# Altium PCB RS485-CAN.PcbDoc
Units mm, origin at the board's own origin, x right, y up, seen from the top; angles counter-clockwise.
Board outline 60.98 x 42.57 mm, 2 copper layers (Top Layer, Bottom Layer); 67 components, 43 nets, 219 pads, 110 vias.
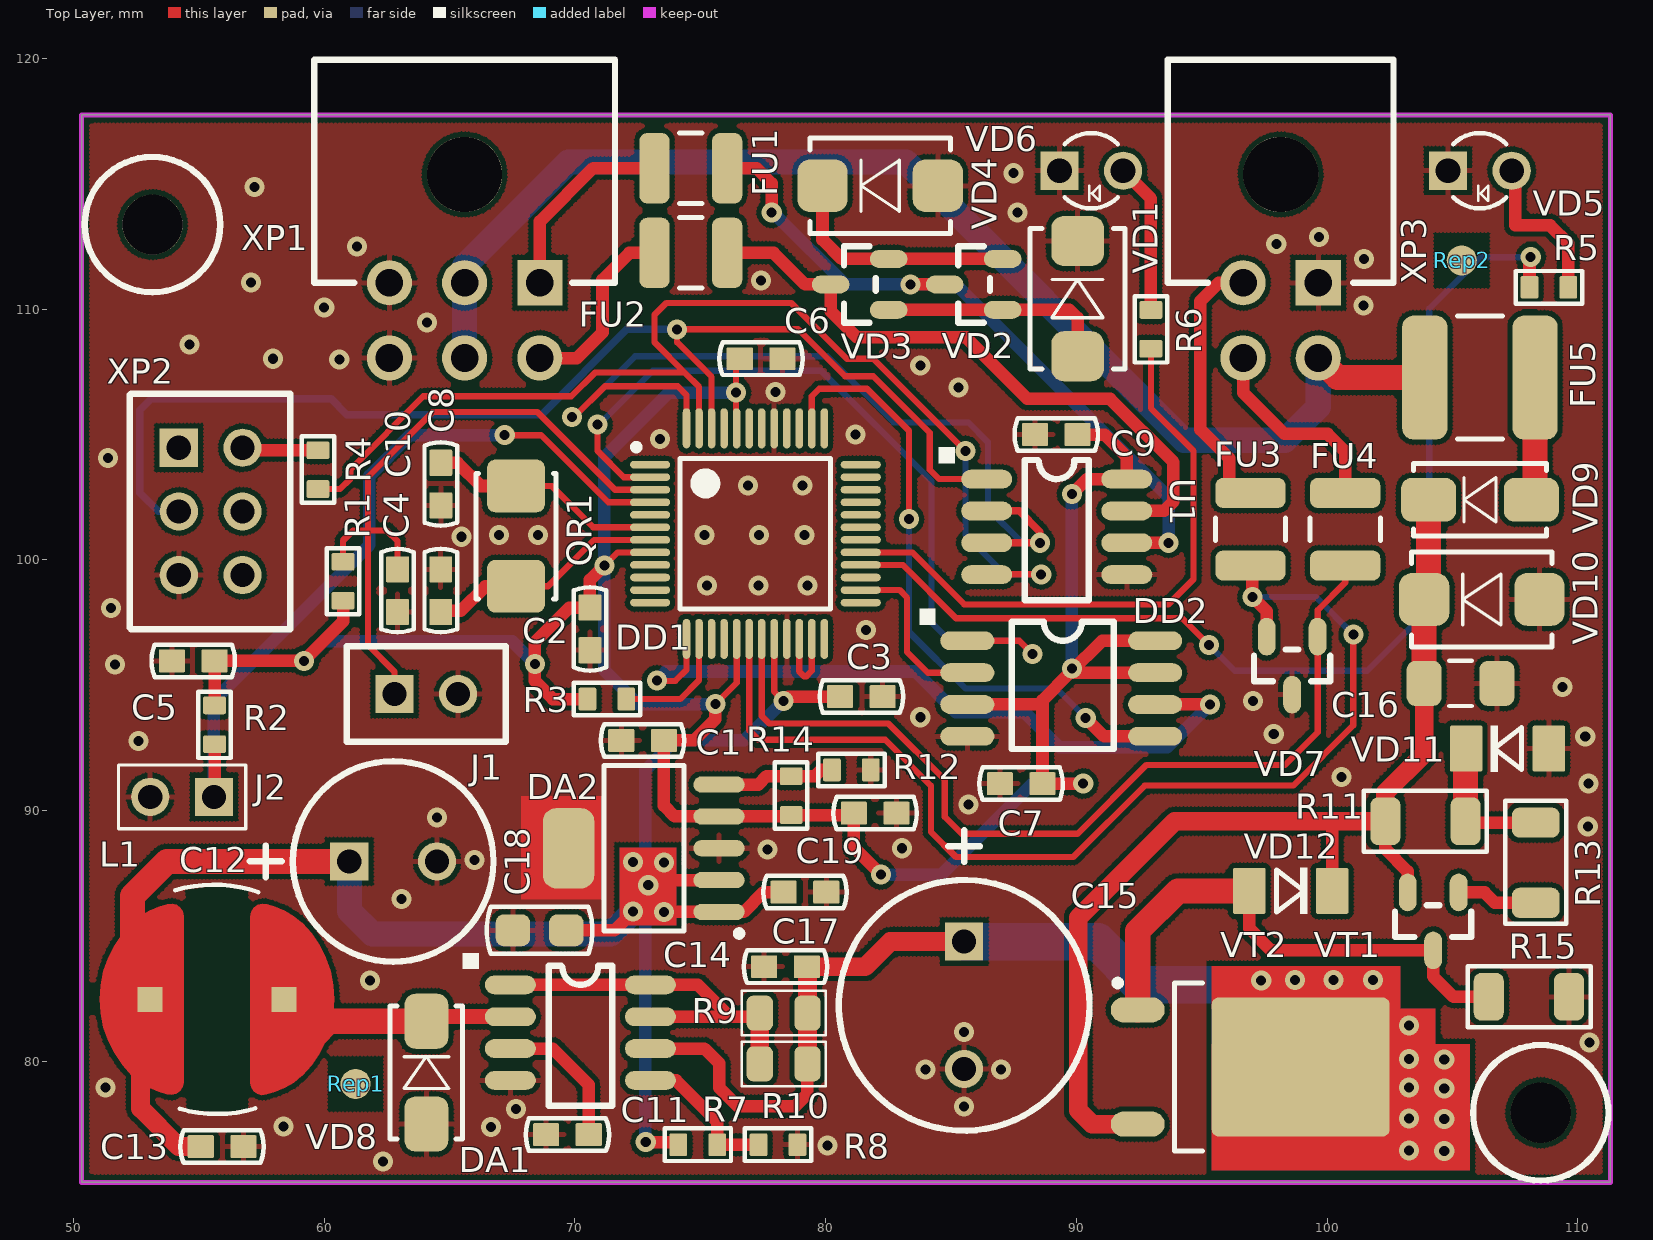
[diagram p0: Top Layer view]
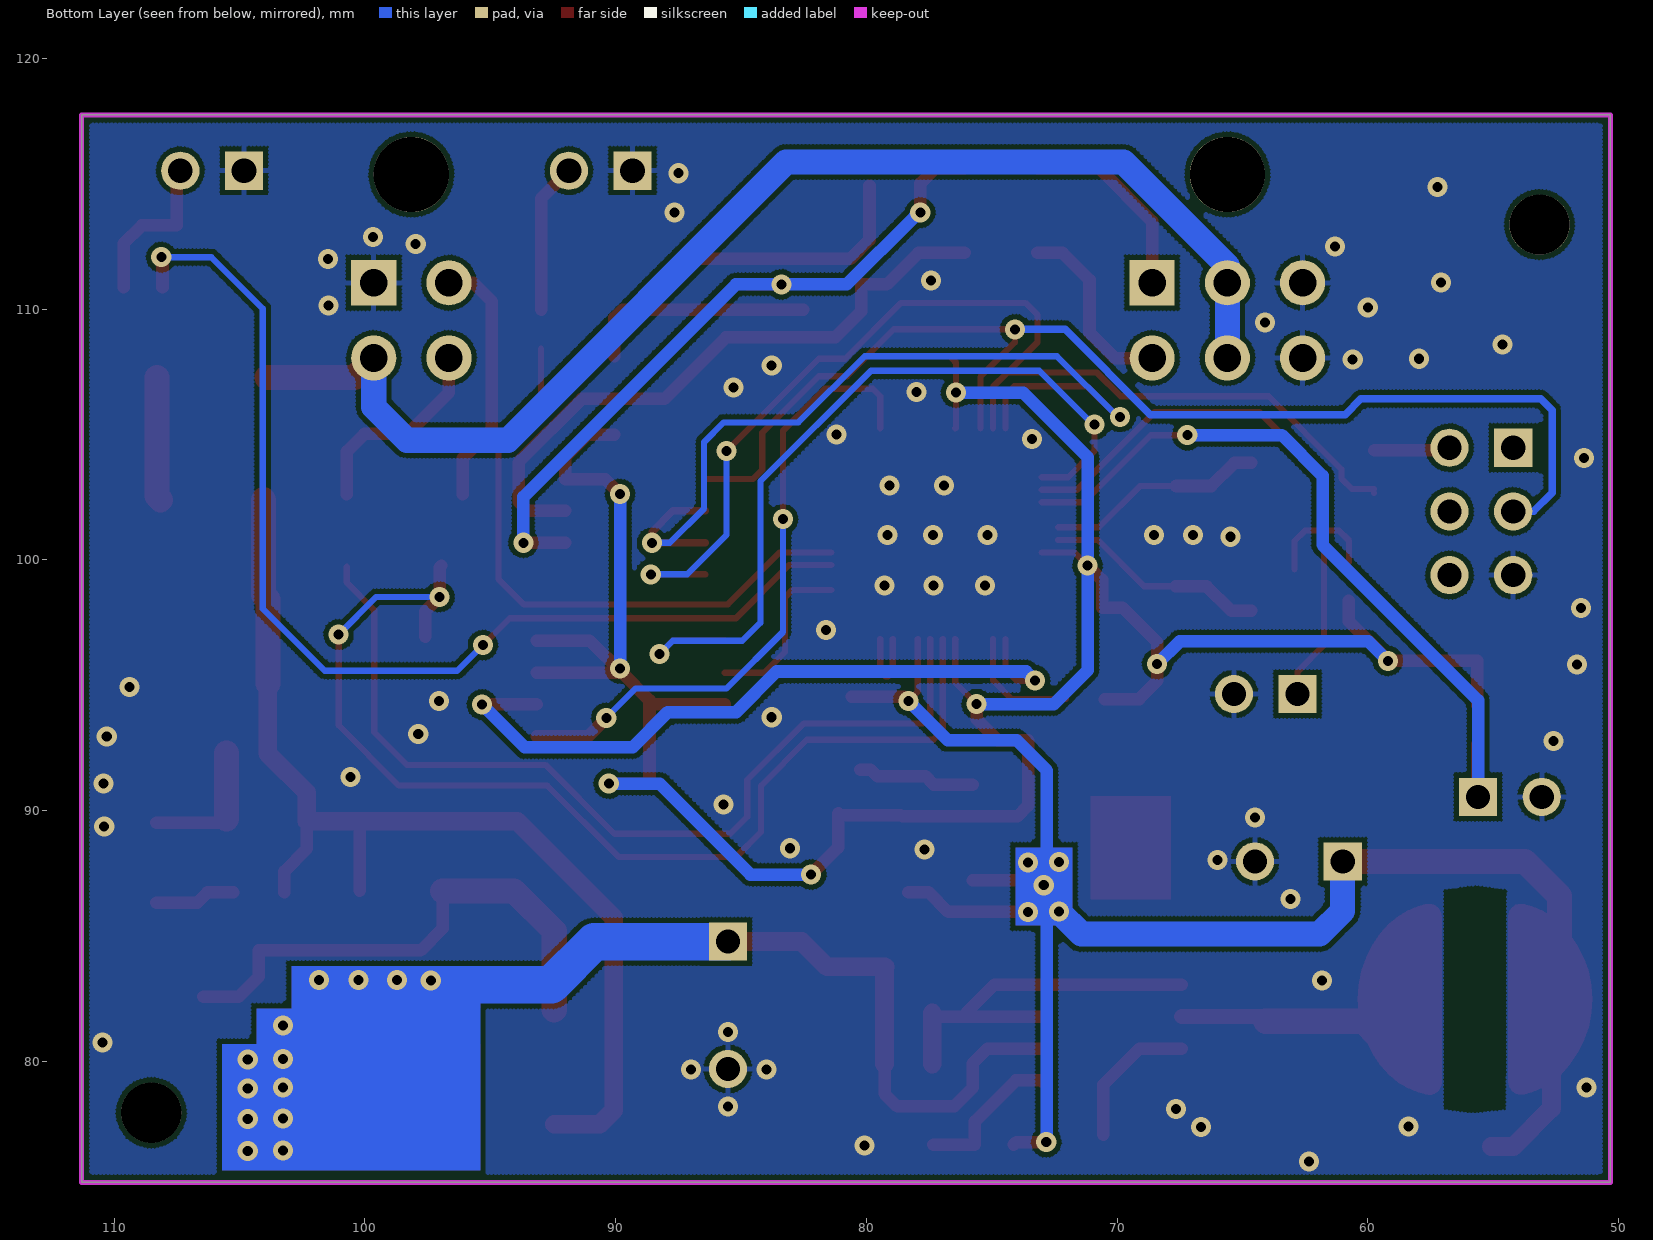
[diagram p1: Bottom Layer view, seen from below]

## Layer stack, top to bottom
Top Solder: solder mask 0.0102, Solder Resist, Dk 3.5
Top Layer: signal copper 0.0356
Dielectric 1: dielectric 0.32, FR-4, Dk 4.8
Bottom Layer: signal copper 0.0356
Bottom Solder: solder mask 0.0102, Solder Resist, Dk 3.5

## Board outline
50.325,75.175 50.325,117.75 111.3,117.75 111.3,75.175

## Design rules (kind name [scope] priority, off if disabled: settings)
Clearance [All] p1: gap=0.2
ComponentClearance [All] p1 off: gap=0.254 collisioncheckmode=3 verticalgap=0.254 showdistances=FALSE
Height [All] p1 off: minheight=0 maxheight=25.4 prefheight=12.7
HoleSize [All] p1: absolutevalues=TRUE maxlimit=5 minlimit=0.025 maxpercent=80.000 minpercent=20.000
MinimumSolderMaskSliver [All] p1: minsoldermaskwidth=0.05
PolygonConnect PolygonConnect_1 [IsVia] p1: connectstyle=Direct reliefconductorwidth=0.254 reliefentries=4 polygonreliefangle="90 Angle" airgapwidth=0.254
PolygonConnect [All] p2: connectstyle=Relief reliefconductorwidth=0.2 reliefentries=4 polygonreliefangle="90 Angle" airgapwidth=0.2
RoutingVias [All] p1: holewidth=0.4 width=0.8 viastyle="Through Hole" minholewidth=0.3 minwidth=0.6 maxholewidth=0.5 maxwidth=1
SilkToSilkClearance [All] p1: silktosilkclearance=0.1
SilkToSolderMaskClearance [IsPad] p1: minsilkscreentomaskgap=0.1 clearancetoexposedcopper=TRUE
SolderMaskExpansion SolderMaskExpansion_1 [InComponent('DD1')] p1: expansion=0.05
SolderMaskExpansion [All] p2: expansion=0.102
Width [All] p1: maxlimit=2 minlimit=0.2 preferedwidth=0.5
24 further rules are at their usual default settings.

## Classes and differential pairs
component class Main: C1 C2 C3 C4 C7 C8 C9 C10 C11 C12 DD1 DD2 FU1 FU2 FU3 FU4 J1 J2 QR1 R1 R2 R3 R4 R5 R6 Rep1 Rep2 U1 VD1 VD2 VD3 VD4 VD5 VD6 VD7 XP1 XP2
component class Power: C12 C13 C14 C15 C16 C17 C18 C19 DA1 DA2 FU5 L1 R7 R8 R9 R10 R11 R12 R13 R14 R15 VD8 VD9 VD10 VD11 VD12 VT1 VT2 XP2

## Components (designator, comment, footprint, x,y, rotation, side; value= is the part's Value field where it differs from the comment)
C1 "0.1uF" CC0603-3M 72.7,92.8 r180 top
C2 "0.1uF" CC0603-3M 70.6,97.25 r270 top
C3 "0.1uF" CC0603-3M 81.425,94.55 r0 top
C4 "200pF" CC0603-3M 62.925,98.775 r90 top
C5 "200pF" CC0603-3M 54.775,95.975 r0 top
C6 "0.1uF" CC0603-3M 77.425,108.025 r0 top
C7 "0.1uF" CC0603-3M 87.8,91.075 r0 top
C8 "22pF" CC0603-3M 64.65,103.025 r90 top
C9 "0.1uF" CC0603-3M 89.2,105 r180 top
C10 "22pF" CC0603-3M 64.648,98.775 r270 top
C11 "330pFx50V" CC0603-3M 69.7,77.075 r0 top
C12 "1000uFx10V" CC8X3.5 61,87.975 r0 top
C13 "1uFx16V" CC0603-3M 55.925,76.6 r180 top
C14 "0.1uFx50V" CC0603-3M 78.4,83.775 r180 top
C15 "470uF" CC16X10_CAP0.5(1)(Primary) 85.525,84.775 r270 top
C16 "0.1uFx250V" CC1206-MIDI 106.775,95.075 r180 top
C17 "0.1uFx50V" CC0603-3M 79.175,86.75 r0 top
C18 "4.7uFx16V" CC0805-MIDI-2M1 67.525,85.225 r0 top
C19 "1uFx10V" CC0603-3M 81.975,89.9 r180 top
DA1 "MC34063" SO-8 67.425,83.05 r270 top
DA2 "MCP1824T-ADJE/DC" SOT223-6 72.75,88.5 r180 top
DD1 "LPC11C24FBD48" LQFP48 77.2,101.05 r0 top
DD2 "M25P40" EIAJ_SO8 85.65,96.775 r0 top
FU1 "MICROSMD010F-2" RC1210 74.625,115.625 r180 top
FU2 "MICROSMD010F-2" RC1210 74.625,112.25 r180 top
FU3 "MICROSMD010F" RC1210 96.95,101.225 r90 top
FU4 "MICROSMD010F" RC1210 100.725,101.225 r90 top
FU5 "MF-SMDF050" MF-SMDF 106.1,107.275 r0 top
J1 "PLS-02" PIN2W 62.8,94.65 r0 top
J2 "PLS-02" PLS-02 55.6,90.55 r180 top
L1 "220uH" SDR0805 55.725,82.475 r0 top
QR1 "NX5032GA-12.000MHz LN-CD-1" AC5032_2 67.65,100.95 r270 top
R1 "10k" RC0603-3M 60.75,99.15 r90 top
R2 "10k" RC0603-3M 55.625,93.425 r90 top
R3 "10k" RC0603-3M 71.275,94.45 r180 top
R4 "100E" RC0603-3M 59.75,103.6 r90 top
R5 "330" RC0603-3M 108.85,110.875 r0 top
R6 "330" RC0603-3M 92.975,109.2 r90 top
R7 "3k 1%" RC0603-3M 74.9,76.675 r180 top
R8 "1k 1%" RC0603-3M 78.1,76.675 r180 top
R9 "1E" RC0805_IPC_NOM 78.325,81.925 r180 top
R10 "1E" RC0805_IPC_NOM 78.325,79.9 r180 top
R11 "220k" RC1206-2M 105.525,89.575 r180 top
R12 "15k 1%" RC0603-3M 81.025,91.625 r180 top
R13 "220k" RC1206-2M 108.325,86.325 r90 top
R14 "105k 1%" RC0603-3M 78.625,90.6 r90 top
R15 "220k" RC1206-2M 106.45,82.575 r0 top
Rep1 "REPER1.2" REPER1.2 61.25,79.1 r90 top
Rep2 "REPER1.2" REPER1.2 105.375,111.95 r90 top
U1 "ST3485EBDR" SO-8 86.425,103.225 r270 top
VD1 "SMBJ5.0A" SMB 90.05,110.425 r270 top
VD2 "BAV99" SOT-23(GSD) 87.075,109.975 r90 top
VD3 "BAV99" SOT-23(GSD) 82.525,109.975 r90 top
VD4 "SMBJ5.0A" SMB 82.175,114.925 r0 top
VD5 "BL-B45V1-L" LED3 104.825,115.525 r0 top
VD6 "GNL-3014GC" LED3 89.325,115.525 r0 top
VD7 "PESD2CAN" SOT-23(123) 99.625,96.95 r90 top
VD8 "SS14" SMA 64.075,79.55 r90 top
VD9 "GS1M" SMA 106.1,102.4 r180 top
VD10 "SMBJ150A" SMB 106.175,98.425 r0 top
VD11 "BZV55C36" SOD-80 107.2,92.475 r0 top
VD12 "BZV55C15" SOD-80 98.55,86.8 r180 top
VT1 "BC856B" SOT-23(123) 105.25,86.75 r90 top
VT2 "IRFR9220" D-PAK(TO-252AA) 96.95,79.775 r0 top
XP1 "MIF2X03PRP" MIF2X03PRP 65.6,111.055 r90 top
XP2 "PLD-06" PIN6 54.2,104.475 r270 top
XP3 "MIF2X02PRP" MIF2X02PRP 98.15,115.375 r90 top

## Footprints (in the part's own frame and the unit in brackets; to place one, negate y for a bottom-side part, rotate by r counter-clockwise, add the part's x,y. Pads: shape width x height; smd on the part's side, far side on the other; paste and mask are expansions set on the pad)
AC5032_2 [mm]
  rrect30% 2.1x2.3 smd: 1(-2,0) 2(2,0)
  silkscreen extent -2.5,-1.6 2.5,1.6
CC8X3.5 [mil]
  rect 60x60 hole 38: 1(0,0)
  round 60 hole 38: 2(137.8,0)
  silkscreen extent -156,-157 226,157
CC16X10_CAP0.5(1)(Primary) [mil]
  round 60 hole 38: 1(200,0)
  rect 60x60 hole 38: 2(0,0)
  silkscreen extent -175,-197 297,197
CC0603-3M [mil]
  rrect10% 40.98x35.98 smd paste-1000: 1(-33.5,0) 2(33.5,0)
  silkscreen extent -65,-26 65,26
CC0805-MIDI-2M1 [mil]
  rrect50% 54x50 smd: 1(0,0) 2(84,0)
  silkscreen extent -41,-37 125,37
CC1206-MIDI [mm]
  rrect50% 1.4x1.8 smd: 1(0,0) 2(2.9,0)
  silkscreen extent 1,-0.9 1.9,0.9
D-PAK(TO-252AA) [mm]
  oval 2.15x1 smd: 1(-4.5,2.28) 2(-4.5,-2.28)
  rrect10% 7.1x5.55 smd: 3(2,0)
  silkscreen extent -5.42,-3.35 -1.92,3.47
EIAJ_SO8 [mil]
  oval 85x29.53 smd: 1(0,0) 2(0,-50) 3(0,-100) 4(0,-150) 5(295,-150) 6(295,-100) 7(295,-50) 8(295,0)
  silkscreen extent -75,-170 230,50
LED3 [mil]
  rect 60x60 hole 39: 1(0,0)
  round 60 hole 39: 2(100,0)
  silkscreen extent 8,-59 92,59
LQFP48 [mm]
  oval 1.6x0.3 smd: 1(-4.2,2.75) 2(-4.2,2.25) 3(-4.2,1.75) 4(-4.2,1.25) 5(-4.2,0.75) 6(-4.2,0.25) 7(-4.2,-0.25) 8(-4.2,-0.75) 9(-4.2,-1.25) 10(-4.2,-1.75) 11(-4.2,-2.25) 12(-4.2,-2.75) 25(4.2,-2.75) 26(4.2,-2.25) 27(4.2,-1.75) 28(4.2,-1.25) 29(4.2,-0.75) 30(4.2,-0.25) 31(4.2,0.25) 32(4.2,0.75) 33(4.2,1.25) 34(4.2,1.75) 35(4.2,2.25) 36(4.2,2.75)
  oval 0.3x1.6 smd: 13(-2.75,-4.2) 14(-2.25,-4.2) 15(-1.75,-4.2) 16(-1.25,-4.2) 17(-0.75,-4.2) 18(-0.25,-4.2) 19(0.25,-4.2) 20(0.75,-4.2) 21(1.25,-4.2) 22(1.75,-4.2) 23(2.25,-4.2) 24(2.75,-4.2) 37(2.75,4.2) 38(2.25,4.2) 39(1.75,4.2) 40(1.25,4.2) 41(0.75,4.2) 42(0.25,4.2) 43(-0.25,4.2) 44(-0.75,4.2) 45(-1.25,4.2) 46(-1.75,4.2) 47(-2.25,4.2) 48(-2.75,4.2)
  silkscreen extent -4.87,-3 3,3.57
MF-SMDF [mm]
  rrect50% 1.8x4.95 smd: 1(-2.2,0) 2(2.2,0)
  silkscreen extent -0.9,-2.45 0.9,2.45
MIF2X02PRP [mm]
  rect 1.8x1.8 hole 1.1: 1(-4.32,-1.5)
  round 1.8 hole 1.1: 2(-4.32,1.5) 3(-7.32,-1.5) 4(-7.32,1.5)
  round 3 hole 3 unplated: 5(0,0)
  silkscreen extent -4.32,-4.5 4.58,4.5, body extent -7.6,-5.1 4.65,5.05, height 8.77
MIF2X03PRP [mm]
  rect 1.8x1.8 hole 1.1: 1(0,-3)
  round 1.8 hole 1.1: 2(0,0) 3(0,3) 4(-3,-3) 5(-3,0) 6(-3,3)
  round 3 hole 3 unplated: 7(4.32,0)
  silkscreen extent 0,-6 8.9,6, body extent 0,-5.97 8.9,6.02, height 7.1
PIN2W [mil]
  rect 60x60 hole 38: 1(0,0)
  round 60 hole 38: 2(100,0)
  silkscreen extent -75,-75 175,75
PIN6 [mil]
  rect 60x60 hole 38: 1(0,0)
  round 60 hole 38: 2(0,100) 3(100,0) 4(100,100) 5(200,0) 6(200,100)
  silkscreen extent -85,-77 285,175
PLS-02 [mil]
  rect 60x60 hole 37.99: 1(0,0)
  round 60 hole 37.99: 2(100,0)
  silkscreen extent -50,-50 150,50, body extent -50,-50 150,50, height 398
RC0603-3M [mm]
  rrect20% 0.71x0.91 smd paste-25.4: 1(-0.775,0) 2(0.775,0)
  silkscreen extent -1.32,-0.65 1.33,0.65
RC0805_IPC_NOM [mm]
  rrect50% 1.05x1.4 smd: 1(-0.95,0) 2(0.95,0)
  silkscreen extent -1.67,-0.89 1.67,0.89
RC1206-2M [mm]
  rrect50% 1.2x1.9 smd: 1(0,0) 2(3.2,0)
  silkscreen extent -0.84,-1.22 4.06,1.22
RC1210 [mm]
  rrect50% 1.2x2.8 smd: 1(-1.45,0) 2(1.45,0)
  silkscreen extent -0.45,-1.4 0.45,1.4
REPER1.2 [mm]
  round 1.2 smd paste-25.4 mask-25.4: 1(0,0)
  Top Layer pour cut-out: -1.2,-1.2 1.2,-1.2 1.2,1.2 -1.2,1.2
SDR0805 [mm]
  rect 1x1 smd paste-25.4 mask-25.4: 1(-2.667,0) 2(2.667,0)
  Top Layer region: 1.327,-3.319 1.362,-3.503 1.461,-3.66 1.612,-3.771 1.792,-3.818 1.977,-3.797 2.318,-3.69 2.706,-3.535 3.065,-3.321 3.387,-3.053 3.392,-3.047 3.771,-2.627 4.09,-2.16 4.345,-1.654 4.53,-1.119 4.642,-0.565 4.68,0 4.642,0.565 4.53,1.119 4.345,1.654 4.09,2.16 3.771,2.627 3.392,3.047 3.381,3.059 3.063,3.323 2.709,3.534 2.325,3.688 1.996,3.791 1.806,3.813 1.62,3.764 1.465,3.65 1.363,3.488 1.327,3.299
  Top Layer region: -1.327,3.319 -1.362,3.503 -1.461,3.66 -1.612,3.771 -1.792,3.818 -1.977,3.797 -2.318,3.69 -2.706,3.535 -3.065,3.321 -3.387,3.053 -3.392,3.047 -3.771,2.627 -4.09,2.16 -4.345,1.654 -4.53,1.119 -4.642,0.565 -4.68,0 -4.642,-0.565 -4.53,-1.119 -4.345,-1.654 -4.09,-2.16 -3.771,-2.627 -3.392,-3.047 -3.381,-3.059 -3.063,-3.323 -2.709,-3.534 -2.325,-3.688 -1.996,-3.791 -1.806,-3.813 -1.62,-3.764 -1.465,-3.65 -1.363,-3.488 -1.327,-3.299
  silkscreen extent -1.66,-4.57 1.64,4.57
SMA [mm]
  rrect50% 2.2x1.75 smd: 1(-2.05,0) 2(2.05,0)
  silkscreen extent -2.65,-1.45 2.65,1.45
SMB [mm]
  rrect50% 2x2.1 smd: 1(2.3,0) 2(-2.3,0)
  silkscreen extent -2.8,-1.9 2.8,1.9
SO-8 [mil]
  oval 29.53x80 smd: 1(0,0) 2(50,0) 3(100,0) 4(150,0) 5(150,220) 6(100,220) 7(50,220) 8(0,220)
  silkscreen extent -50,-75 190,160
SOD-80 [mm]
  rrect10% 1.3x1.83 smd paste-25.4: 1(1.651,0) 2(-1.651,0)
  silkscreen extent -0.66,-0.91 0.56,0.91
SOT223-6 [mm]
  oval 2.05x0.65 smd: 1(-3,2.54) 2(-3,1.27) 3(-3,0) 4(-3,-1.27) 5(-3,-2.54)
  rrect50% 2.05x3.2 smd: 6(3,0)
  silkscreen extent -3.93,-3.3 1.6,3.52
SOT-23(123) [mil]
  oval 59.06x28.07 smd: 1(-0.5,0) 2(-0.5,80) 3(-91.5,40)
  silkscreen extent -70,-20 -21,100
SOT-23(GSD) [mil]
  oval 28.07x59.06 smd: 1(0,0.5) 2(80,0.5) 3(40,91.5)
  silkscreen extent -20,21 100,70

## Part data
C1 C2 C3 C4 C5 C6 C7 C8 C9 C10 C11 C13 C14 C17 C19: library part CC0603, "CC0603"
C12: library part CAP0.35, "CAP0.35"
C15: library part CAP0.5(1), "CAP0.5(1)"
C16: library part CC1206, "CC1206"
C18: library part CC0805, "CC0805"
DA2: "300 mA, Low Voltage, Low Quiescent Current LDO Regulator, 5-Pin SOT-223, Extended Temperature, Tape and Reel"
DD2: library part S25FL016A0LMFI01, "S25FL016A0LMFI01"
FU1 FU2 FU3 FU4: library part MICROSMD, "MICROSMD"
FU5: library part MF-SMDF, "MF-SMDF"
L1: library part SDR0805, "SDR0805"
QR1: library part AC5032_2, "AC5032/2"
R1 R2 R3 R4 R5 R6 R7 R8 R12 R14: library part RC0603, "RC0603"
R9 R10: library part RC0805, "RC0805"
R11 R13 R15: library part RC1206, "RC1206"
VD1 VD4 VD10: library part SMBJ, "SMBJ"
VD2 VD3: "1.0 Ampere General Purpose Rectifier"
VD5 VD6: library part LED_3, "LED_3"
VD7: "TVS for CAN"
VD8: "Schottky Rectifier"
VD11 VD12: library part BZV55C12, "Zener Voltage Regulator Diode"
VT2: "HEXFET Power MOSFET"
XP1: "MIF2x03PRP"
XP2: "PLD06"

## Free pads (board coordinates)
  round 2.4 hole 2.4 unplated paste+0 mask+0.102: 0(53.15,113.375)
  round 2.4 hole 2.4 unplated: 0(108.525,77.95)

## Via types
v1: diameter 0.8, hole 0.4, Top Layer to Bottom Layer, 110 vias

## Nets (pads, with @x,y where several pads share a name; then routed paths per layer and width w, separated by ;. In a path a pad name is that pad's centre, name@x,y a point inside that pad or via, vN(x,y) a via of type N, cw(c..) or ccw(c..) an arc to the next point about the centre after c; other vN are vias at no path point)
+5V: C3.1 C12.1 C13.2 C17.1 C18.2 DA2.1 DA2.2 DD1.20 L1.1 R7.2 | length 71.3
  Top Layer w0.25: DD1.20 77.95,94.75 v1(78.325,94.375)
  Top Layer w0.5: C18.2 71.575,85.225 v1(72.325,85.975) ; v1(72.825,76.775) 74.025,76.775 R7.2 ; DA2.2 73.38,87.23 72.8,86.65 73.49,85.96 v1(73.55,85.96) DA2.1 76.735,85.96 77.525,86.75 C17.1 ; v1(78.325,94.375) 78.5,94.55 C3.1
  Top Layer w0.75: 52.675,80.975 52.675,78.125 54.2,76.6 C13.2
  Top Layer w1: 52.35,84.65 52.35,86.6 53.725,87.975 C12.1
  Bottom Layer w0.5: v1@72.8,86.65 72.8,91.6 74,92.8 76.75,92.8 v1(78.325,94.375) ; v1(72.825,76.775) 72.8,76.8 72.8,85.96 v1(73.55,85.96)
  Bottom Layer w1: C12.1 61,86 61.925,85.075 71.425,85.075 v1(72.325,85.975)
  other v1: 72.925,87.025 73.55,87.925 72.325,87.95
A: VD1.1 VD2.1 VD3.1 | length 9.2
  Top Layer w0.5: VD3.1 VD2.1 89.725,109.975 90.05,109.65 VD1.1
CAN_CON: DD1.28 R5.1 | length 43.5
  Top Layer w0.25: DD1.28 83.075,99.8 85.2,97.675 94.225,97.675 v1(95.3,96.6)
  Top Layer w0.5: R5.1 108.075,112.025 v1(108.125,112.075)
  Bottom Layer w0.25: v1(95.3,96.6) 96.325,95.575 101.6,95.575 104.075,98.05 104.075,110.025 106.125,112.075 v1(108.125,112.075)
CANH: DD1.19 FU4.1 VD7.1 | length 36.8
  Top Layer w0.25: DD1.19 77.45,93.775 77.75,93.475 82.503,93.475 84.75,91.228 84.75,89.75 85.425,89.075 90.05,89.075 92.8,91.825 98.325,91.825 99.625,93.125 VD7.1 99.625,98 100.725,99.1 FU4.1@100.725,99.725
CANHF: FU4.2 XP3.4 | length 8.1
  Top Layer w0.5: XP3.4@96.65,108.05 96.65,106.675 98.3,105.025 100.025,105.025 100.725,104.325 FU4.2@100.725,102.625
CANL: DD1.18 FU3.1 VD7.2 | length 44.5
  Top Layer w0.25: DD1.18 76.95,93.2 77.325,92.825 82.375,92.825 84.2,91 84.2,89.15 85.2,88.15 89.875,88.15 92.725,91 98.65,91 101.05,93.4 v1(101.05,97.025)
  Top Layer w0.5: FU3.1 97.025,99.7 v1(97.025,98.525) 97.593,97.957 VD7.2
  Bottom Layer w0.25: v1(97.025,98.525) 99.55,98.525 v1(101.05,97.025)
CANLF: FU3.2 XP3.2 | length 10.2
  Top Layer w0.5: FU3.2@96.1,102.625 96.1,104.05 94.95,105.2 94.95,110.325 95.675,111.05 XP3.2@96.65,111.05
GND: C1.2 C2.2 C3.2 C4.1 C5.1 C6.2 C7.1 C8.1 C9.2 C10.1 C11.1 C12.2 C13.1 C14.2 C15.1 C16.1 C17.2 C18.1 C19.1 DA1.4 DA2.3 DA2.6 DD1.21 DD1.41 DD2.4 J1.2 J2.2 R8.1 R12.1 R15.2 U1.5 VD1.2 VD4.1 VD5.1 VD6.1 VD7.3 VD8.1 VD10.1 VD11.1 XP1.3 XP1.6 XP2.5 XP3.1
  other v1: 62.35,76 80.075,76.65 66.65,77.375 58.375,77.4 67.65,78.1 85.525,78.2 51.275,78.95 83.975,79.675 87,79.675 110.475,80.75 85.525,81.175 61.825,83.225 63.075,86.475 66,88.025 77.675,88.45 83.05,88.5 110.4,89.375 64.5,89.725 85.7,90.25 110.425,91.075 100.575,91.35 52.6,92.775 110.3,92.95 97.875,93.05 83.775,93.725 97.05,94.375 109.4,94.925 51.65,95.825 81.613,97.2 51.5,98.075 75.275,98.975 77.325,98.975 79.275,98.975 65.475,100.925 66.975,101 68.525,101 75.175,101 77.35,101 79.15,101 76.9,102.975 79.075,102.975 51.375,104.075 73.4,104.825 81.2,105 78,106.7 85.3,106.875 83.775,107.75 60.6,108 57.95,108.025 54.625,108.6 64.1,109.475 60,110.075 101.45,110.15 57.075,111.075 77.425,111.15 101.475,112 61.3,112.5 97.975,112.6 99.675,112.875 87.65,113.85 57.225,114.875 87.5,115.425
ISP_START: DD1.4 J2.1 R2.1 | length 30.5
  Top Layer w0.25: v1(67.2,104.975) 68.65,104.975 71.325,102.3 DD1.4
  Top Layer w0.5: J2.1 55.625,90.575 R2.1
  Bottom Layer w0.5: J2.1 55.6,94.4 61.8,100.6 61.8,103.35 63.425,104.975 v1(67.2,104.975)
ISP_VAR: DD1.14 R3.1 | length 4.9
  Top Layer w0.25: R3.1 74.2,94.45 74.95,95.2 DD1.14
K: VD2.2 VD3.2 VD4.2 | length 9.7
  Top Layer w0.5: VD4.2 79.875,112.775 80.643,112.007 VD3.2 VD2.2
MISO: DD1.26 DD2.2 | length 6.9
  Top Layer w0.25: DD1.26 82.95,98.8 83.25,98.5 83.25,96.325 84.07,95.505 DD2.2
MOSI: DD1.38 DD2.5 | length 25.5
  Top Layer w0.25: DD1.38 79.45,106.525 79.75,106.825 81.65,106.825 83.325,105.15 v1(83.325,101.625)
  Top Layer w0.5: v1(90.375,93.7) 91.11,92.965 DD2.5
  Bottom Layer w0.25: v1(83.325,101.625) 83.325,97.125 85.575,94.875 89.2,94.875 v1(90.375,93.7)
NetC11_2: C11.2 DA1.3 | length 5.7
  Top Layer w0.5: DA1.3 69.115,80.51 70.551,79.074 C11.2
NetC16_2: C16.2 R11.2 VD9.2 VD10.2 VD12.2 VT1.2 VT2.2 | length 43.7
  Top Layer w0.5: 100.1,89.575 100.201,89.474 VD12.2 ; R11.2 102.325,88.475 103.218,87.582 VT1.2
  Top Layer w0.75: VT2.2 90.63,77.495 90.075,78.05 90.075,85.725 93.925,89.575 100.1,89.575 R11.2 102.325,90.725 103.875,92.275 C16.2
  Top Layer w1: C16.2 VD10.2 104.05,98.6 VD9.2
NetDA1_1: DA1.1 DA1.7 DA1.8 R9.2 R10.2 | length 15.7
  Top Layer w0.5: DA1.1 DA1.8 74.9,83.05 76.025,81.925 75.88,81.78 ; DA1.7 75.88,81.78 ; R9.2 77.23,81.78 75.88,81.78
  Top Layer w0.75: R10.2 R9.2
NetDA1_2: DA1.2 L1.2 VD8.2 | length 8.2
  Top Layer w0.6: VD8.2 64.255,81.78 DA1.2
  Top Layer w1: 59.567,80.975 60.192,81.6 VD8.2
NetDA1_5: DA1.5 R7.1 R8.2 | length 6
  Top Layer w0.5: DA1.5@72.95,79.177 DA1.5 74.035,79.24 75.675,77.6 R7.1 R8.2
NetDA2_5: DA2.5 R12.2 R14.2 | length 4.7
  Top Layer w0.5: DA2.5 77.315,91.04 77.65,91.375 R14.2 79.575,91.375 79.825,91.625 R12.2
NetFU1_1: FU1.1 U1.6 VD2.3 | length 28.4
  Top Layer w0.5: FU1.1@76.125,115.675 FU1.1 77.25,115.625 77.85,115.025 v1(77.85,113.85) ; v1(83.391,110.991) VD2.3 ; U1.6 v1(93.685,100.685)
  Bottom Layer w0.5: v1@78.087,113.687 80.784,110.991 v1(83.391,110.991) 85.209,110.991 93.685,102.515 v1(93.685,100.685)
NetFU1_2: FU1.2 XP1.1 | length 7.9
  Top Layer w0.5: XP1.1@68.6,111.05 68.6,113.5 70.725,115.625 FU1.2
NetFU2_1: FU2.1 U1.7 VD3.3 | length 25.5
  Top Layer w0.5: FU2.1 77.925,112.25 79.184,110.991 VD3.3 80.201,109.924 81.25,108.875 85.6,108.875 88.05,106.425 91.35,106.425 93.875,103.9 93.875,102.325 93.505,101.955 U1.7
NetFU2_2: FU2.2 XP1.4 | length 7.5
  Top Layer w0.5: XP1.4@68.6,108.05 70.075,108.05 71.1,109.075 71.1,111.175 72.175,112.25 FU2.2
NetFU5_2: FU5.2 VD9.1 | length 4.9
  Top Layer w1: VD9.1 108.3,102.55 FU5.2
NetR4_2: R4.2 XP2.2 | length 3.1
  Top Layer w0.5: XP2.2 56.84,104.375 R4.2
NetR5_2: R5.2 VD5.2 | length 6.4
  Top Layer w0.5: VD5.2 107.515,115.375 107.515,113.35 108.9,113.35 109.625,112.625 R5.2
NetR6_2: R6.2 VD6.2 | length 6
  Top Layer w0.5: VD6.2 92.975,114.415 R6.2
NetR11_1: R11.1 R13.2 VD11.2 | length 5.4
  Top Layer w0.5: R11.1 105.575,89.525 R13.2
  Top Layer w1: R11.1@105.524,89.674 VD11.2@105.524,92.3
NetR13_1: R13.1 VT1.1 | length 3.2
  Top Layer w0.5: VT1.1 106.288,86.737 106.7,86.325 R13.1
NetR15_1: R15.1 VD12.1 VT1.3 VT2.1 | length 21
  Top Layer w0.5: VD12.1 96.899,85.301 97.774,84.426 VT1.3 104.234,83.391 105.05,82.575 R15.1
  Top Layer w1: VT2.1 92.45,85.2 94.05,86.8 VD12.1
RE_DE: DD1.48 U1.2 U1.3 | length 35.9
  Top Layer w0.25: v1(69.878,105.705) 69.98,105.705 71.2,106.925 74.1,106.925 74.45,106.575 DD1.48
  Top Layer w0.3: U1.3 v1(88.55,100.685) 88.55,101.125 87.72,101.955 U1.2
  Bottom Layer w0.25: v1(69.878,105.705) 69.98,105.705 72.4,108.125 80.069,108.125 82.71,105.485 85.69,105.485 86.475,104.7 86.475,102.05 87.84,100.685 v1(88.55,100.685)
RESET: C4.2 DD1.3 J1.1 R1.2 | length 27.2
  Top Layer w0.25: R1.2 60.75,100.775 61.15,101.175 61.75,101.175 ; J1.1 62.8,95.55 61.75,96.6 61.75,101.175 ; C4.2 62.925,100.75 62.5,101.175 61.75,101.175 ; DD1.3 71.6,102.8 68.5,105.9 64.325,105.9 61.75,103.325 61.75,101.175
RS485_CON: DD1.29 R6.1 | length 24.5
  Top Layer w0.25: DD1.29 83.45,100.3 85.525,98.225 93.675,98.225 94.675,99.225 94.675,104.35 92.975,106.05 R6.1
RXD: DD1.46 U1.1 XP2.3 | length 48.6
  Top Layer w0.25: DD1.46 75.45,107.3 74.075,108.675 v1(74.075,109.2) 78.9,109.2 80.775,107.325 81.9,107.325 84.15,105.075 84.15,103.6 84.525,103.225 U1.1
  Bottom Layer w0.3: XP2.3 53.39,101.935 52.65,102.675 52.65,105.975 53.1,106.425 60.275,106.425 60.9,105.8 68.675,105.8 72.075,109.2 v1(74.075,109.2)
SCK: DD1.13 DD2.6 | length 29
  Top Layer w0.25: v1(73.275,95.2) 73.3,95.175 74,95.175 74.45,95.625 DD1.13
  Top Layer w0.5: DD2.6 v1(95.335,94.235)
  Bottom Layer w0.5: v1(73.275,95.2) 73.625,95.55 83.575,95.55 85.2,93.925 87.925,93.925 89.325,92.525 93.625,92.525 v1(95.335,94.235)
SS: DD1.2 DD2.1 | length 32.6
  Top Layer w0.25: v1(70.9,105.4) 70.9,104.35 71.95,103.3 DD1.2 ; DD2.1 87.725,96.775 v1(88.25,96.25)
  Bottom Layer w0.25: v1(70.9,105.4) 70.95,105.4 73.1,107.55 79.817,107.55 84.225,103.142 84.225,97.5 84.95,96.775 87.725,96.775 v1(88.25,96.25)
STB: DD1.22 DD1.23 | length 3.3
  Top Layer w0.25: DD1.22 78.95,95.55 79.15,95.35 79.225,95.35 79.45,95.575 DD1.23
TXD: DD1.47 R4.1 U1.4 | length 46.3
  Top Layer w0.25: R4.1 60.625,102.825 61.05,103.25 61.05,103.625 63.95,106.525 69.85,106.525 70.8,107.475 74.375,107.475 ; DD1.47 74.95,106.9 74.375,107.475 ; v1(85.575,104.35) 81.9,108.025 80.85,108.025 78.625,110.25 73.65,110.25 73.175,109.775 73.175,108.675 74.375,107.475 ; U1.4 86.435,99.425 v1(88.6,99.425)
  Bottom Layer w0.25: v1(85.575,104.35) 85.575,101 87.15,99.425 v1(88.6,99.425)
VCC: C1.1 C2.1 C5.2 C6.1 C7.2 C9.1 C19.2 DA2.4 DD1.8 DD1.17 DD1.44 DD2.3 DD2.7 DD2.8 R1.1 R2.2 R3.2 R14.1 U1.8 | length 109.7
  Top Layer w0.25: v1(71.175,99.775) 71.7,100.3 DD1.8 ; v1(75.6,94.25) 76.45,95.1 DD1.17 DD1.17@76.425,96.825 ; DD1.44 76.425,105.275 v1(76.425,106.675) 76.425,107.876 C6.1
  Top Layer w0.5: R2.2 55.626,94.201 C5.2 59.175,95.975 60.75,97.55 R1.1 ; R3.2 69.125,94.45 68.4,95.175 v1(68.4,95.85) 68.4,96.725 69.776,98.101 C2.1 70.6,99.2 v1(71.175,99.775) ; v1(75.6,94.25) 75.6,93.65 74.75,92.8 C1.1 73.551,90.199 73.98,89.77 DA2.4 78.57,89.77 R14.1 81.049,89.825 C19.2 81.124,88.526 v1(82.2,87.45) ; DD2.3 88.485,94.235 ; v1(89.825,102.625) 90.425,103.225 U1.8 92.013,104.112 91.125,105 C9.1 ; v1(90.275,91.075) C7.2 88.651,94.401 v1@89.755,95.505 ; DD2.7 v1@89.755,95.505 ; DD2.8 91.025,96.775 v1@89.755,95.505
  Bottom Layer w0.5: v1(59.2,95.975) 59.975,96.75 67.5,96.75 v1(68.4,95.85) ; v1(75.6,94.25) 72.525,94.25 71.175,95.6 v1(71.175,99.775) 71.175,104.1 73.75,106.675 v1(76.425,106.675) ; v1(82.2,87.45) 84.625,87.45 88.25,91.075 v1(90.275,91.075) ; v1(89.825,95.675) v1(89.825,102.625)
VIN: FU5.1 XP1.2 XP1.5 XP3.3 | length 51.1
  Top Layer w1: XP3.3@99.65,108.05 100.425,107.275 FU5.1
  Bottom Layer w1: XP1.5@65.6,108.05 65.6,111.05 65.6,111.725 69.75,115.875 83.2,115.875 94.3,104.775 98.325,104.775 99.65,106.1 XP3.3@99.65,108.05
VIN_F: C14.1 C15.2 DA1.6 R9.1 R10.1 VT2.3 | length 33
  Top Layer w0.5: DA1.6 75.165,80.51 75.75,79.925 75.75,78.95 76.5,78.2 78.775,78.2 79.275,78.7 R10.1
  Top Layer w0.75: R10.1 R9.1 79.275,83.751 C14.1 81.575,83.775 82.575,84.775 C15.2
  Bottom Layer w1.5: C15.2 90.85,84.775 92.575,83.05 98.05,83.05
  other v1: 104.675,76.425 103.275,76.45 104.675,77.7 103.275,77.725 104.675,78.925 103.275,78.95 104.675,80.075 103.275,80.1 103.275,81.425 97.375,83.225 98.725,83.25 100.25,83.25 101.825,83.25
XTALIN: C8.2 DD1.6 QR1.1 | length 8.8
  Top Layer w0.25: QR1.1 69.075,102.95 70.725,101.3 DD1.6@72.35,101.3
  Top Layer w0.5: C8.2 65.324,103.876 66.25,102.95 QR1.1
XTALOUT: C10.2 DD1.7 QR1.2 | length 8.9
  Top Layer w0.25: QR1.2 68.925,98.95 70.775,100.8 DD1.7@72.35,100.8
  Top Layer w0.5: C10.2@64.648,97.974 65.449,97.974 66.425,98.95 QR1.2
pads on no net: DD1.1 DD1.5 DD1.9 DD1.10 DD1.11 DD1.12 DD1.15 DD1.16 DD1.24 DD1.25 DD1.27 DD1.30 DD1.31 DD1.32 DD1.33 DD1.34 DD1.35 DD1.36 DD1.37 DD1.39 DD1.40 DD1.42 DD1.43 DD1.45 Rep1.1 Rep2.1 XP1.7 XP2.1 XP2.4 XP2.6 XP3.5

## Polygon pours and split planes (outlines as drawn)
GND on Top Layer "Top" (hatched 90Degree grid 0.15 track 0.2, remove dead copper, pour order 15): 50.325,117.75 111.3,117.75 111.3,75.175 50.325,75.175
GND on Bottom Layer "Bot" (hatched 90Degree grid 0.15 track 0.2, remove dead copper, pour order 17): 50.325,117.75 111.3,117.75 111.3,75.175 50.325,75.175

## Keep-outs
Keep-Out Layer:
  lines w0.2: 50.325,75.175 50.325,117.75 82.725,117.75 111.3,117.75 111.3,75.175 50.325,75.175

## Other copper
Top Layer:
  rectangle net GND: 67.85,86.45 71.05,90.575
  rectangle net +5V: 71.775,85.425 74.05,88.525
  rectangle net VIN_F: 102.45,80.575 104.325,82.1
  rectangle net VIN_F: 95.4,82.1 102.925,83.8
  rectangle net VIN_F: 95.4,75.65 105.7,80.7
  pour cut-out: 54.381,85.863 54.375,86.927 55.675,87.1 57.025,86.927 57.052,86.9 57.052,78.029 57.025,78.002 55.837,77.85 54.4,78.002
Bottom Layer:
  rectangle net +5V: 71.775,85.425 74.05,88.525
  rectangle net VIN_F: 104.325,75.65 105.7,80.7
  rectangle net VIN_F: 102.175,75.65 104.325,82.1
  rectangle net VIN_F: 102.525,81.875 102.925,83.8
  rectangle net VIN_F: 95.4,75.65 102.525,83.8
  pour cut-out: 54.381,85.863 54.375,86.927 55.675,87.1 57.025,86.927 57.052,86.9 57.052,78.029 57.025,78.002 55.837,77.85 54.4,78.002

## Silkscreen, mask and mechanical layers (free items; w line width, h text height)
Top Overlay:
  circle w0.254: c108.525,77.95 r2.7
  circle w0.254: c53.15,113.375 r2.7
Mechanical 3:
  rectangle: 130.2,115.7 130.85,115.95
  rectangle: 124.7,116.025 132.9,117
  lines w0.2: 129.975,116 130.525,115.45 130.575,115.45 ; 130.575,115.475 130.575,115.45 ; 131.05,115.9 130.6,115.45 130.575,115.45 ; 131.625,119.075 130.575,119.075 130.575,117 130.575,115.45 ; 124.8,116.025 124.8,117 132.9,117 132.9,116.025 124.8,116.025
  lines w0.3: 131.65,118.525 132.85,118.525 ccw(c132.831,119.094) 132.95,119.65 131.65,119.65 131.65,118.525
  text "VD5,VD6" at 126.525,120.2 h1

## Dimensions
132.9,117 to 133.4,119.094 on Mechanical 3
132.9,117 to 133.4,119.094 on Mechanical 3
50.325,75.175 to 111.3,75.175 on Mechanical 1
50.325,75.175 to 50.325,116.15 on Mechanical 1